# EAGLE board ModuleCapteur (EAGLE 5.06)
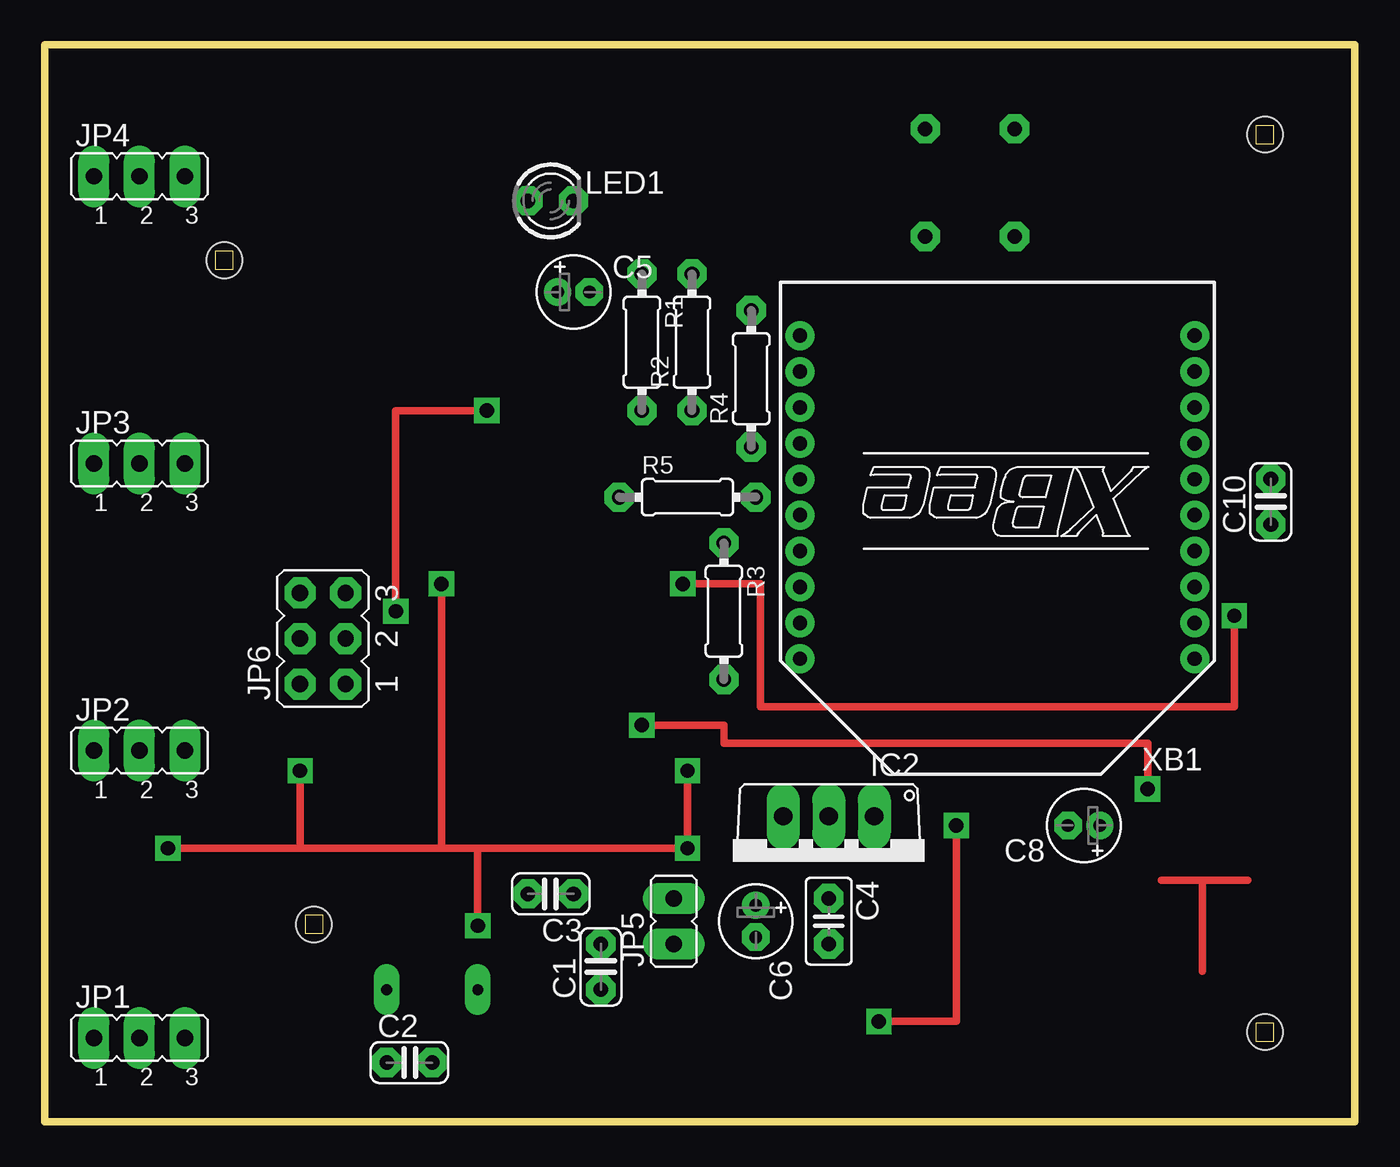
[diagram p0: board, top side]
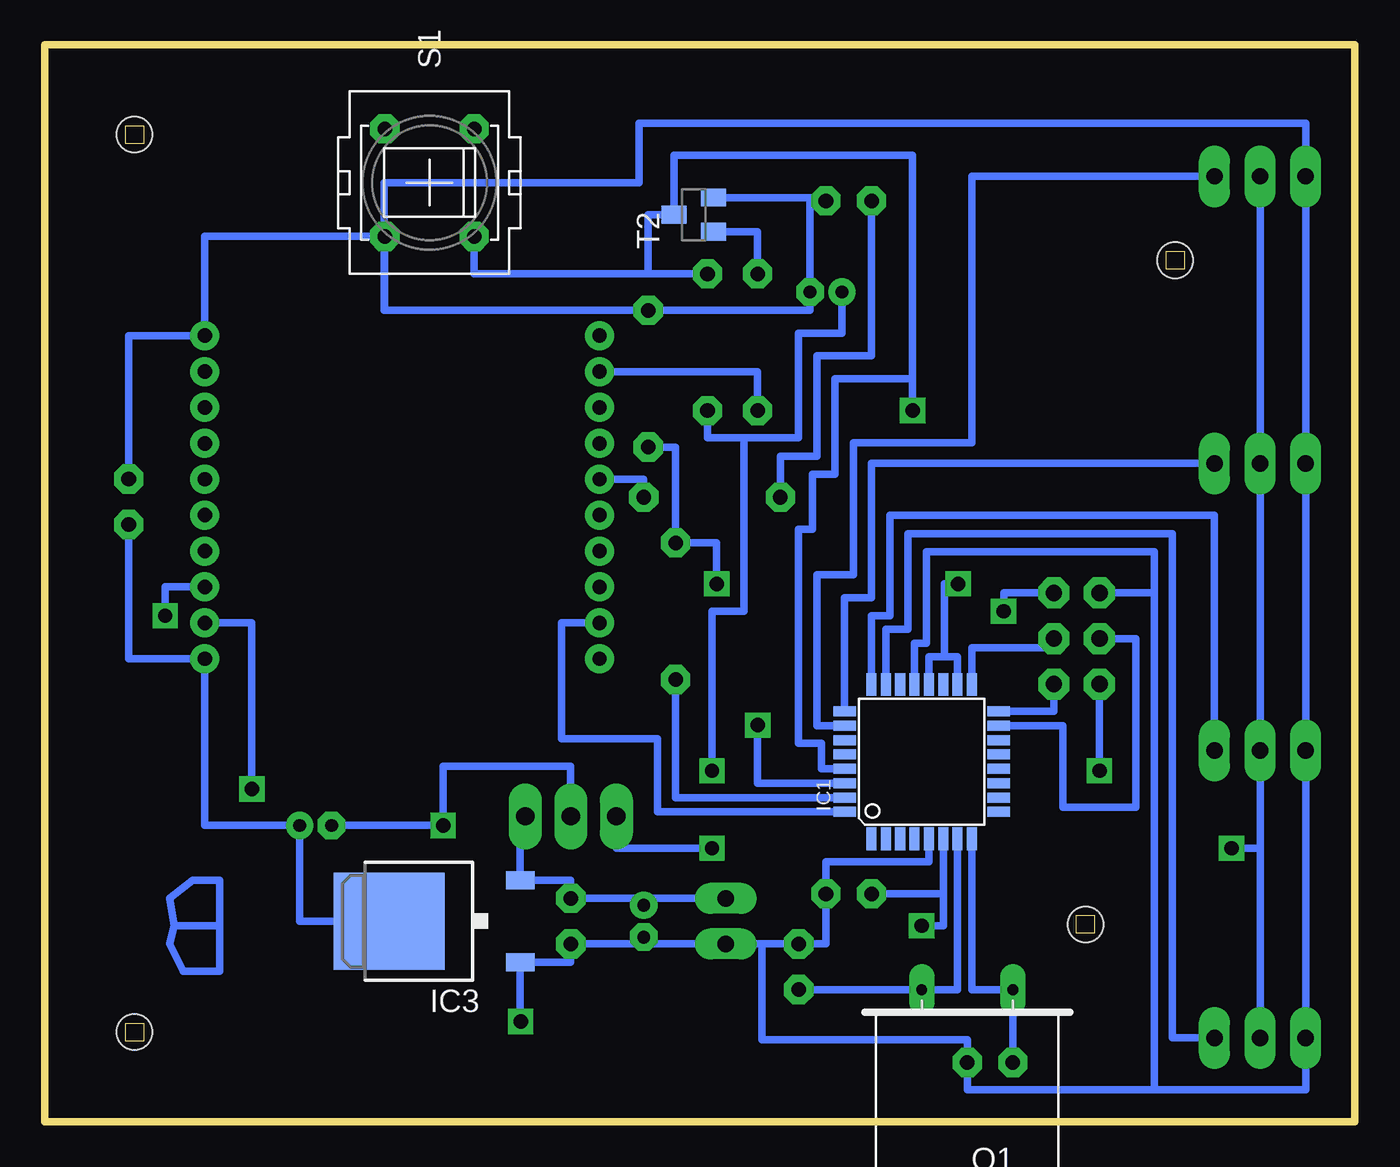
[diagram p1: board, bottom side, seen from below]

Size 73 x 60 mm. Coordinates in mm from the lower left corner, seen from the top.
Outline: 0,0 0,60 73,60 73,0 0,0
Copper layers (1*16): Top 0.035mm / dielectric 1.5mm / Bottom 0.035mm
Design rules "DesignRules": minimum track width 16mil, minimum drill 24mil, track to track 14mil, track to pad 12mil, pad to pad 8mil, via to via 16mil, smd to smd 8mil, copper to edge 40mil, drill to drill 8mil, minimum pad ring 16mil, minimum via ring 12mil, stop-mask expansion 4mil, vias tented up to drill 0mil, thermal gap 10mil
Holes 2 mm at 68,55 68,5 15,11 10,48

## Footprints (pad centres in the part's own frame; a part is rotated, then mirrored left to right if it is on the bottom)
C025-024X044 = drill 0.813 octagon: 1 -1.27,0; 2 1.27,0
C025-025X050 = drill 0.813 octagon: 1 -1.27,0; 2 1.27,0
E1,8-4 = drill 0.711 pad 1.168 round: + -0.889,0 | drill 0.711 pad 1.168 octagon: - 0.889,0
TQFP32-08 = smd 1.27 x 0.559: 1 -4.293,2.8; 2 -4.293,2; 3 -4.293,1.2; 4 -4.293,0.4; 5 -4.293,-0.4; 6 -4.293,-1.2; 7 -4.293,-2; 8 -4.293,-2.8; 17 4.293,-2.8; 18 4.293,-2; 19 4.293,-1.2; 20 4.293,-0.4; 21 4.293,0.4; 22 4.293,1.2; 23 4.293,2; 24 4.293,2.8 | smd 0.559 x 1.27: 9 -2.8,-4.293; 10 -2,-4.293; 11 -1.2,-4.293; 12 -0.4,-4.293; 13 0.4,-4.293; 14 1.2,-4.293; 15 2,-4.293; 16 2.8,-4.293; 25 2.8,4.293; 26 2,4.293; 27 1.2,4.293; 28 0.4,4.293; 29 -0.4,4.293; 30 -1.2,4.293; 31 -2,4.293; 32 -2.8,4.293
TO220V = drill 1.016 long: 1 -2.54,-2.54; 2 0,-2.54; 3 2.54,-2.54
DPACK = smd 1 x 1.6: 1 -2.28,-4.8; 3 2.28,-4.8 | smd 5.4 x 6.2: 2 0,2.5
JP2 = drill 0.914 long: 1 -2.54,0; 2 0,0; 3 2.54,0
JP1 = drill 0.914 long: 1 0,-1.27; 2 0,1.27
JP3Q = drill 0.914 octagon: 1 -2.54,-1.27; 2 -2.54,1.27; 3 0,-1.27; 4 0,1.27; 5 2.54,-1.27; 6 2.54,1.27
LED3MM = drill 0.813 octagon: A -1.27,0; K 1.27,0
Q = drill 0.61 long: 1 -2.54,-7.62; 2 2.54,-7.62
0204/7 = drill 0.813 octagon: 1 -3.81,0; 2 3.81,0
PVA1R = drill 0.813 octagon: 1 -2.997,2.489; 2 -2.997,-2.489; 3 2.997,2.489; 4 2.997,-2.489
SOT23 = smd 1 x 1.4: 1 -0.95,-1.1; 2 0.95,-1.1; 3 0,1.1
XBEE = drill 0.8 pad 1.27 round: 1 -11,9; 2 -11,7; 3 -11,5; 4 -11,3; 5 -11,1; 6 -11,-1; 7 -11,-3; 8 -11,-5; 9 -11,-7; 10 -11,-9; 11 11,-9; 12 11,-7; 13 11,-5; 14 11,-3; 15 11,-1; 16 11,1; 17 11,3; 18 11,5; 19 11,7; 20 11,9

## Placement (x,y rotation side)
C1  22p  [C025-024X044]  30.99,8.64 90 top
C2  22p  [C025-024X044]  20.32,3.3 0 top
C3  100n  [C025-024X044]  28.19,12.7 180 top
C4  100n  [C025-025X050]  43.69,11.18 270 top
C5  100µ  [E1,8-4]  29.46,46.23 0 top
C6  100µ  [E1,8-4]  39.62,11.18 270 top
C8  100µ  [E1,8-4]  57.91,16.51 180 top
C10  100n  [C025-024X044]  68.33,34.54 90 top
IC1  MEGA8-AI  [TQFP32-08]  24.13,20.07 90 bottom
IC2  7805TV  [TO220V]  43.69,14.48 180 top
IC3  MC33269D-3.3  [DPACK]  51.31,11.18 90 bottom
JP1  [JP2]  5.27,4.68 0 top
JP2  [JP2]  5.27,20.68 0 top
JP3  [JP2]  5.27,36.68 0 top
JP4  [JP2]  5.27,52.68 0 top
JP5  [JP1]  35.05,11.18 0 top
JP6  [JP3Q]  15.49,26.92 90 top
LED1  [LED3MM]  28.19,51.31 0 top
Q1  16M  [Q]  21.59,-0.25 180 bottom
R1  1K  [0204/7]  33.27,43.43 270 top
R2  10K  [0204/7]  36.07,43.43 90 top
R3  3300  [0204/7]  37.85,28.45 270 top
R4  2200  [0204/7]  39.37,41.4 90 top
R5  1K  [0204/7]  35.81,34.8 0 top
S1  PVA1R  [PVA1R]  51.56,52.32 90 bottom
T2  BC848  [SOT23]  36.83,50.55 90 bottom
XB1  XBEE  [XBEE]  53.09,34.8 180 top

## Library data of the parts
C1-C6 C8 C10 R1 = rcl
IC1 = atmel
IC2 IC3 = linear
JP1-JP6 = jumper
LED1 = led
Q1 = special
R2-R5 = resistor
S1 = switch-misc
T2 = transistor
XB1 = maxstream

## Nets
GND: IC1.3
N$2: C1.1 IC1.7 Q1.2
N$3: C2.1 IC1.8 Q1.1
N$4: R1.1 T2.1
N$6: IC1.29 JP6.5 R2.2 S1.2 T2.3
N$7: IC1.32 XB1.19
N$8: IC1.31 R3.2
N$9: R3.1 R4.1 XB1.3
N$10: C8.+ C10.1 IC3.2 XB1.1
N$11: IC1.30 XB1.2
N$12: IC1.23 JP1.3
N$13: LED1.A R5.1
N$14: R5.2 XB1.15
N$15: IC1.24 JP2.3
N$16: IC1.25 JP3.3
N$17: IC1.26 JP4.3
N$18: R1.2 XB1.12
N$19: C4.1 C6.+ IC2.1 IC3.3 JP5.2
N$20: C3.2 C5.+ IC1.6 IC1.18 IC1.20 IC2.3 JP1.2 JP2.2 JP3.2 JP4.2 JP6.2 R2.1
N$21: C1.2 C2.2 C3.1 C4.2 C5.- C6.- C8.- C10.2 IC1.5 IC1.21 IC2.2 IC3.1 JP1.1 JP2.1 JP3.1 JP4.1 JP5.1 JP6.6 LED1.K R4.2 S1.1 T2.2 XB1.10
N$22: IC1.17 JP6.3
N$23: IC1.16 JP6.1
N$25: IC1.15 JP6.4
VCC: IC1.4

## Tracks (layer width: path | path; a pad name or v marks a point on that pad's centre or on a via)
N$1
  Bottom 0.406: 63.25,10.92 63.25,13.46 64.77,13.46 66.04,12.45 65.79,10.92 | 63.25,10.92 63.25,8.38 65.28,8.38 66.04,9.91 65.79,10.92 | 63.25,10.92 65.79,10.92
N$2
  Bottom 0.406: IC1.7 22.13,7.37 Q1.2 C1.1
N$3
  Bottom 0.406: IC1.8 21.33,7.37 Q1.1 C2.1
N$4
  Bottom 0.406: T2.1 33.27,49.6 R1.1
N$5
  Top 0.406: 64.52,13.46 62.23,13.46 | 64.52,13.46 67.06,13.46 | 64.52,8.38 64.52,13.46
N$6  (via drill 0.8)
  Top 0.406: v19.56,28.45 19.56,39.62 v24.64,39.62
  Bottom 0.406: S1.2 49.07,47.24 R2.2 39.37,47.24 39.37,50.55 T2.3 37.93,53.85 24.64,53.85 24.64,41.66 | IC1.29 29.72,19.67 29.72,21.08 30.99,21.08 30.99,33.02 30.23,33.02 30.23,36.07 28.96,36.07 28.96,41.4 24.64,41.4 24.64,41.66 | JP6.5 19.56,29.46 v19.56,28.45 | v24.64,39.62 24.64,41.66
N$7
  Bottom 0.406: XB1.19 44.2,27.8 44.2,21.34 38.86,21.34 38.86,17.27 IC1.32
N$8
  Bottom 0.406: IC1.31 37.85,18.07 R3.2
N$9  (via drill 0.8)
  Top 0.406: v35.56,29.97 39.88,29.97 39.88,23.11 66.29,23.11 v66.29,28.19
  Bottom 0.406: R4.1 37.85,37.59 R3.1 35.56,32.26 v35.56,29.97 | XB1.3 66.29,29.8 v66.29,28.19
N$10
  Bottom 0.406: IC3.2 58.8,11.18 C8.+ 64.09,16.51 XB1.1 68.33,25.8 C10.1
N$11  (via drill 0.8)
  Top 0.406: v33.27,22.1 37.85,22.1 37.85,21.08 61.47,21.08 v61.47,18.54
  Bottom 0.406: IC1.30 33.27,18.87 v33.27,22.1 | v61.47,18.54 61.47,27.8 XB1.2
N$12
  Bottom 0.406: JP1.3 10.16,4.68 10.16,32.77 24.89,32.77 24.89,27.43 26.13,27.43 IC1.23
N$13
  Bottom 0.406: LED1.A 26.92,42.67 29.97,42.67 29.97,37.08 32,37.08 R5.1
N$14
  Bottom 0.406: R5.2 39.62,35.8 XB1.15
N$15
  Bottom 0.406: IC1.24 26.93,28.19 25.91,28.19 25.91,33.78 7.81,33.78 JP2.3
N$16
  Bottom 0.406: IC1.25 28.42,29.21 26.92,29.21 26.92,36.68 JP3.3
N$17
  Bottom 0.406: IC1.26 29.97,22.07 29.97,30.48 27.94,30.48 27.94,37.85 21.34,37.85 21.34,52.68 JP4.3
N$18
  Bottom 0.406: XB1.12 33.27,41.8 R1.2
N$19
  Bottom 0.406: JP5.2 39.88,12.45 | 39.88,12.45 C4.1 43.69,13.46 IC3.3 46.51,17.27 IC2.1 | 39.88,12.45 C6.+
N$20  (via drill 0.8)
  Top 0.406: 24.13,15.24 v35.81,15.24 v35.81,19.56 | v6.86,15.24 14.22,15.24 | 14.22,15.24 22.1,15.24 | 22.1,15.24 v22.1,29.97 | 22.1,15.24 24.13,15.24 | 24.13,15.24 v24.13,10.92 | 14.22,15.24 v14.22,19.56
  Bottom 0.406: JP4.2 JP3.2 JP2.2 5.27,15.24 | IC2.3 41.15,15.24 v35.81,15.24 | C3.2 22.93,12.7 IC1.6 22.93,10.92 v24.13,10.92 | 22.13,25.91 IC1.18 | 22.13,25.91 23.73,25.91 IC1.20 | v35.81,19.56 35.81,28.45 34.04,28.45 34.04,38.1 | 34.04,38.1 30.99,38.1 30.99,43.94 28.57,43.94 C5.+ | 34.04,38.1 36.07,38.1 R2.1 | 22.13,25.91 22.86,25.91 22.86,29.97 v22.1,29.97 | 5.27,15.24 v6.86,15.24 | JP1.2 5.27,15.24 | v14.22,19.56 JP6.2
N$21  (via drill 0.8)
  Top 0.406: v50.8,16.51 50.8,5.59 v46.48,5.59
  Bottom 0.406: 33.02,9.91 33.02,4.57 21.59,4.57 C2.2 21.59,1.78 11.18,1.78 | IC1.5 23.73,14.48 29.46,14.48 C3.1 29.46,9.91 C1.2 33.02,9.91 | 33.02,9.91 JP5.1 39.62,9.91 | 39.62,9.91 C6.- | 39.62,9.91 C4.2 43.69,8.9 IC3.1 46.51,5.59 v46.48,5.59 | IC2.2 43.69,19.81 50.8,19.81 v50.8,16.51 C8.- | C10.2 68.33,43.8 XB1.10 64.09,49.33 S1.1 54.05,45.21 R4.2 30.35,45.21 | IC1.21 24.53,26.67 23.88,26.67 23.88,31.75 11.18,31.75 11.18,29.46 | 30.35,45.21 C5.- 30.35,51.31 LED1.K 29.46,51.5 T2.2 | 30.35,45.21 54.1,45.21 54.1,52.32 39.88,52.32 39.88,55.63 2.73,55.63 JP4.1 JP3.1 JP2.1 JP1.1 2.73,1.78 11.18,1.78 | 11.18,1.78 11.18,29.46 | 11.18,29.46 JP6.6
N$22
  Bottom 0.406: IC1.17 21.33,26.42 16.76,26.42 JP6.3
N$23
  Bottom 0.406: JP6.1 16.76,22.87 IC1.16
N$25
  Bottom 0.406: JP6.4 12.19,26.92 12.19,17.53 16.26,17.53 16.26,22.07 IC1.15